# Altium PCB PCB2.PcbDoc
Units mil, origin at the board's own origin, x right, y up, seen from the top; angles counter-clockwise.
Board outline 2283.46 x 3346.46 mil, 2 copper layers (Top Layer, Bottom Layer); 50 components, 32 nets, 159 pads, 39 vias.
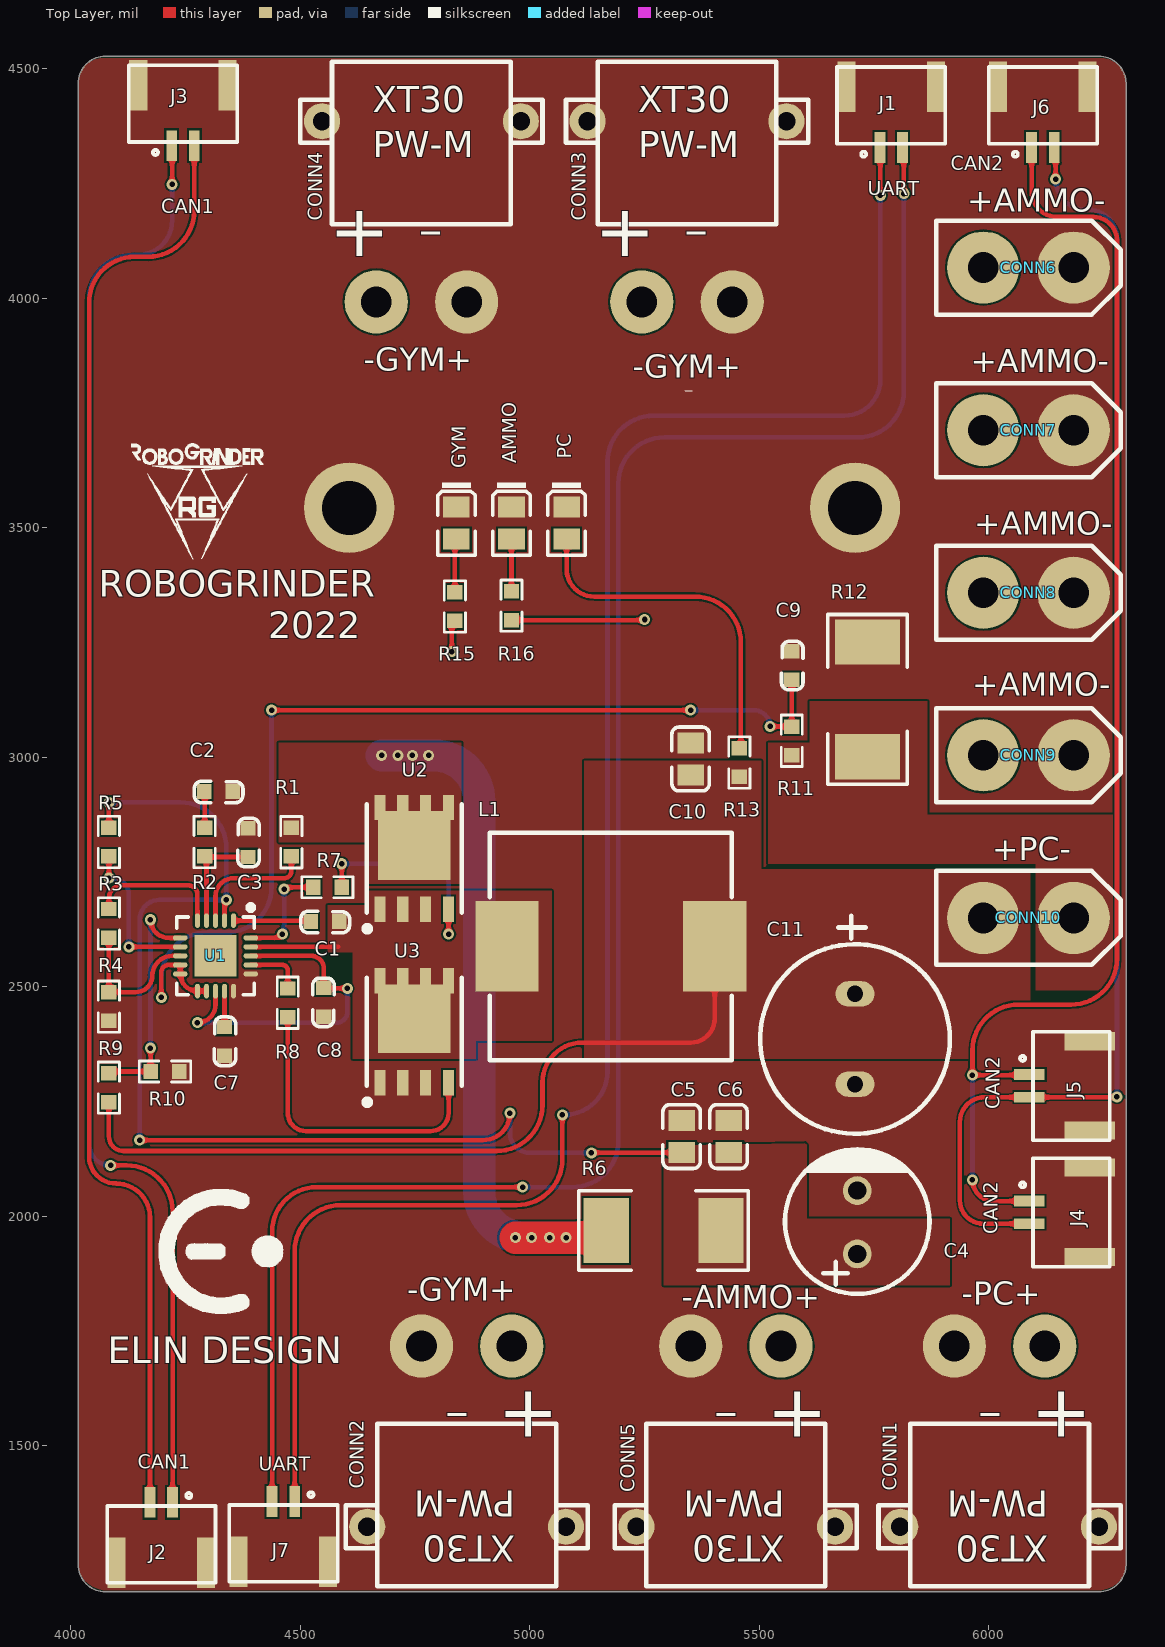
[diagram p0: Top Layer view]
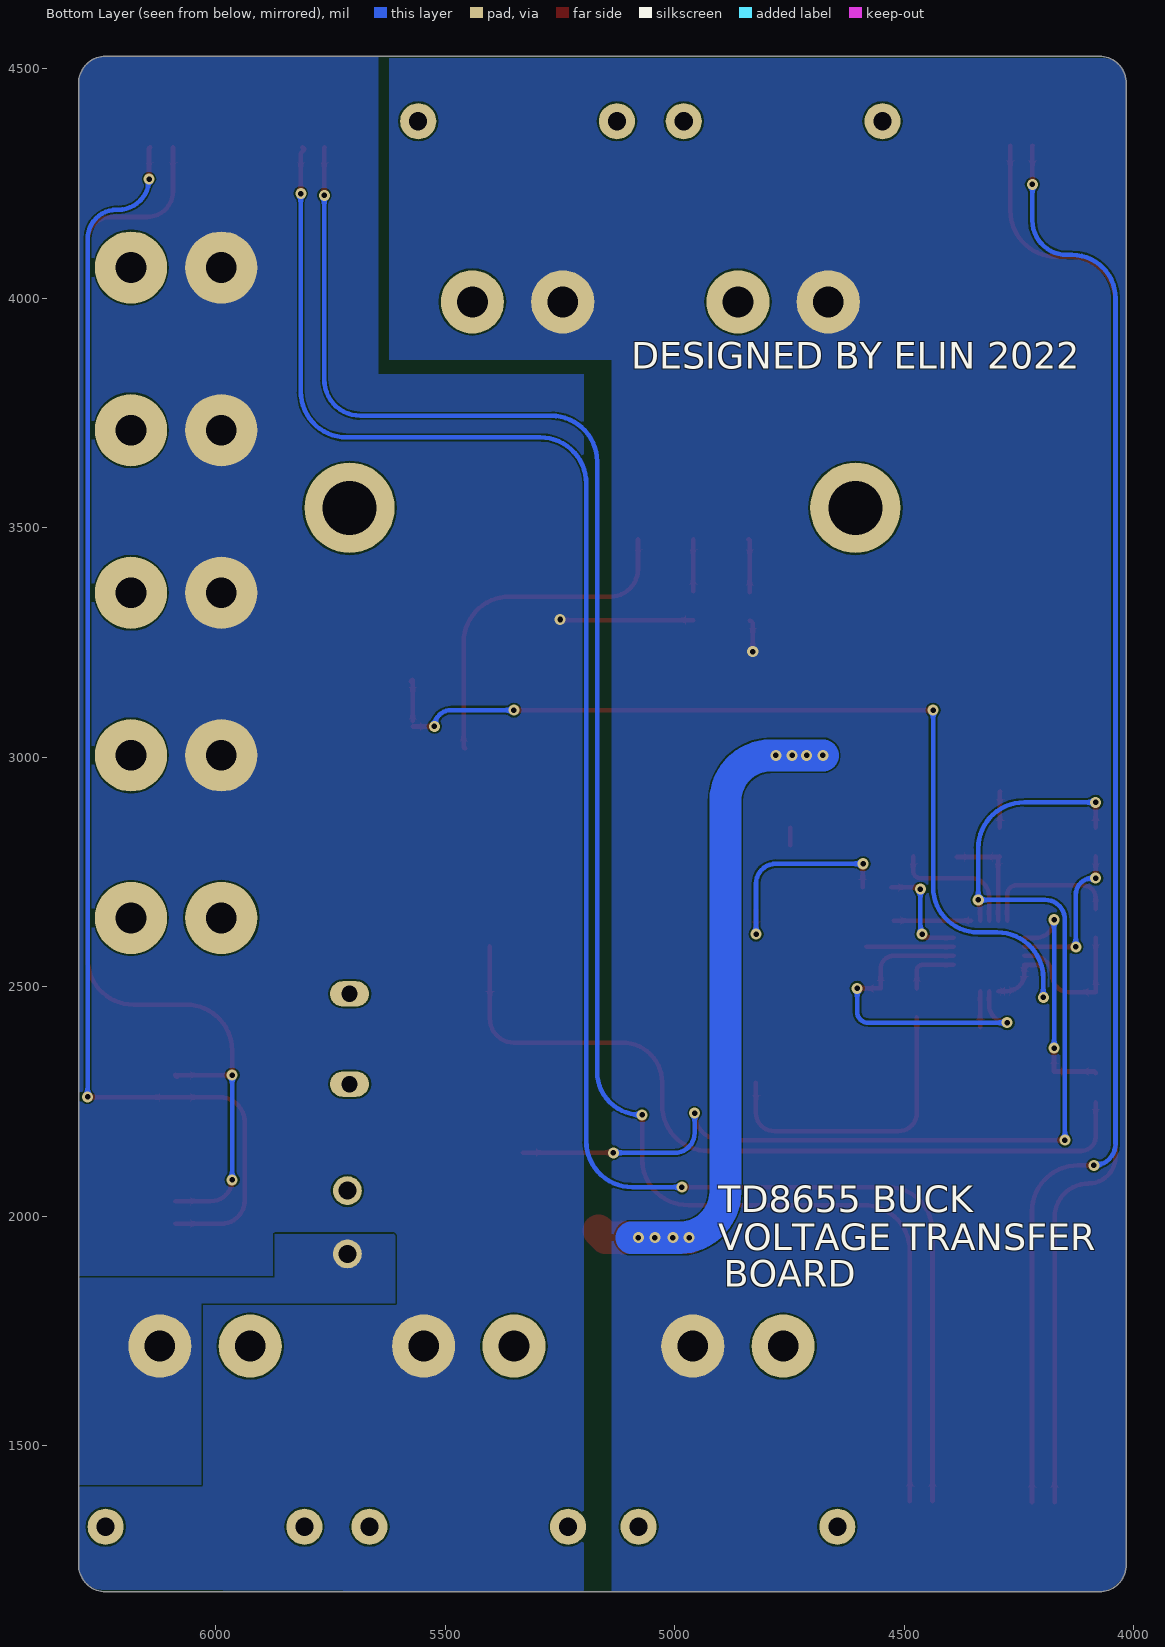
[diagram p1: Bottom Layer view, seen from below]
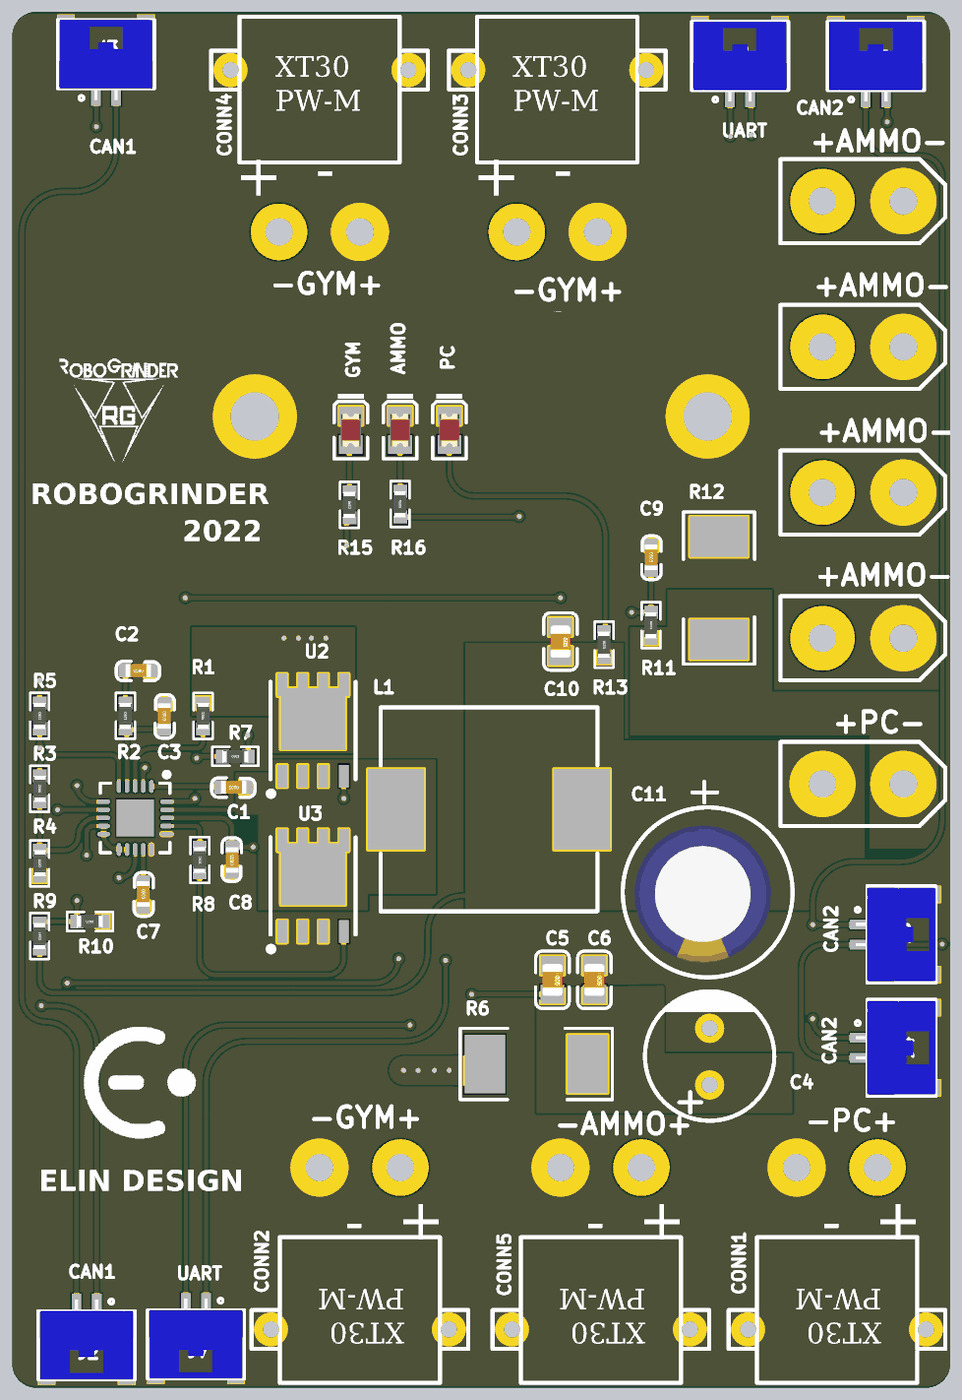
[diagram p2: 3D render of the assembled board from above, using the file's embedded part models]

## Layer stack, top to bottom
Top Solder: solder mask 0.4, Solder Resist, Dk 3.5
Top Layer: signal copper 1.4
Dielectric 1: dielectric 12.6, FR-4, Dk 4.8
Bottom Layer: signal copper 1.4
Bottom Solder: solder mask 0.4, Solder Resist, Dk 3.5

## Board outline
4015.75,1240.16 4015.75,4468.5 cw(c4074.8,4468.5) 4074.8,4527.56 6240.16,4527.56 cw(c6240.16,4468.5) 6299.21,4468.5 6299.21,1240.16 cw(c6240.16,1240.16) 6240.16,1181.1 4074.8,1181.1 cw(c4074.8,1240.16)

## Design rules (kind name [scope] priority, off if disabled: settings)
Clearance [All] p1: gap=4 ignorepadtopadclearanceinfootprint=FALSE
PlaneConnect [All] p1: planeconnectstyle=Direct reliefexpansion=20 reliefentries=4 reliefconductorwidth=10 reliefairgap=10
PolygonConnect [All] p1: connectstyle=Direct reliefconductorwidth=10 reliefentries=4 polygonreliefangle="90 Angle" airgapwidth=10
RoutingVias [All] p1: holewidth=28 width=50 viastyle="Through Hole" minholewidth=28 minwidth=50 maxholewidth=28 maxwidth=50
SolderMaskExpansion [All] p1: expansion=4
Width [All] p1: maxlimit=100 minlimit=10 preferedwidth=10
29 further rules are at their usual default settings.

## Classes and differential pairs
component class Sheet1: C1 C2 C3 C4 C5 C6 C7 C8 C9 C10 C11 CONN1 CONN2 CONN3 CONN4 CONN5 CONN6 CONN7 CONN8 CONN9 CONN10 J1 J2 J3 J4 J5 J6 J7 L1 PC R1 R2 R3 R4 R5 R6 R7 R8 R9 R10 R11 R12 R13 U1 U2 U3

## Components (designator, comment, footprint, x,y, rotation, side; value= is the part's Value field where it differs from the comment)
AMMO "LED" LED_0805 4960,3510 r90 top (schematic designator D1)
C1 "100nF" 0603_C 4555.12,2641.73 r180 top
C2 "2.2nF" 0603_C 4322.83,2925.2 r180 top
C3 "220pF" 0603_C 4385.83,2814.96 r270 top
C4 "100uF" rad8*11 5755.91,1944.88 r90 top
C5 "10uF" 0805_C 5330.71,2173.23 r270 top
C6 "0.1uF" 0805_C 5433.07,2173.23 r270 top
C7 "100nF" 0603_C 4334.65,2381.89 r270 top
C8 "1uF" 0603_C 4551.18,2464.57 r90 top
C9 "4.7uF" 0603_C 5570.87,3200.79 r270 top
C10 "4.7uF" 0805_C 5350.39,2996.06 r270 top
C11 "330uF" dip-ec10*17 5589.66,2474.83 r270 top
CONN1 "XT30PW-M" xt30pw-m 6023.62,1716.54 r180 top
CONN2 "XT30PW-M" xt30pw-m 4862.2,1716.54 r180 top
CONN3 "XT30PW-M" xt30pw-m 5342.52,3992.13 r0 top
CONN4 "XT30PW-M" xt30pw-m 4763.78,3992.13 r0 top
CONN5 "XT30PW-M" xt30pw-m 5448.82,1716.54 r180 top
CONN6 "XT30UPB" XT30UPB 6086.61,4066.93 r0 top
CONN7 "XT30UPB" XT30UPB 6086.61,3712.6 r0 top
CONN8 "XT30UPB" XT30UPB 6086.61,3358.27 r0 top
CONN9 "XT30UPB" XT30UPB 6086.61,3003.94 r0 top
CONN10 "XT30UPB" XT30UPB 6086.61,2649.61 r0 top
GYM "LED" LED_0805 4840,3510 r90 top (schematic designator D1)
J1 "GH1.25-2P" gh1.25-2p-立 5787.4,4460.63 r180 top
J2 "GH1.25-2P" gh1.25-2p-立 4196.85,1244.09 r0 top
J3 "GH1.25-2P" gh1.25-2p-立 4244.09,4464.57 r180 top
J4 "GH1.25-2P" gh1.25-2p-立 6220.47,2007.87 r90 top
J5 "GH1.25-2P" gh1.25-2p-立 6220.47,2283.46 r90 top
J6 "GH1.25-2P" gh1.25-2p-立 6118.11,4460.63 r180 top
J7 "GH1.25-2P" gh1.25-2p-立 4462.87,1246.14 r0 top
L1 "Inductor" SRP1265A-220M 5094.49,2582.68 r0 top value=22uH
PC "LED" LED_0805 5080,3510 r90 top (schematic designator D1)
R1 "20" 0603-R 4480.31,2814.96 r90 top
R2 "300K" 0603-R 4291.34,2814.96 r270 top
R3 "20K" 0603-R 4082.68,2637.8 r90 top
R4 "39K" 0603-R 4082.68,2456.69 r90 top
R5 "1M" 0603-R 4082.68,2814.96 r270 top
R6 "0.005" 2512 5291.34,1968.5 r0 top
R7 "2.2" 0603-R 4559.06,2716.54 r0 top
R8 "2.2" 0603-R 4472.44,2464.57 r270 top
R9 "300k" 0603-R 4082.68,2279.53 r270 top
R10 "20k" 0603-R 4204.72,2314.96 r180 top
R11 "4.7" 0603-R 5570.87,3035.43 r270 top
R12 "0.005" 2512 5736.22,3125.98 r270 top
R13 "10K" 0603-R 5456.69,2988.19 r270 top
R15 "10K" 0603-R 4836.69,3328.19 r270 top (schematic designator R13)
R16 "10K" 0603-R 4960,3330 r270 top (schematic designator R13)
U1 "TD8655" LC-QFN-20_4x4x05P 4314.96,2566.93 r180 top
U2 "TDM3436" LC-DFN-8_5x6mm 4748.03,2779.53 r0 top
U3 "TDM3436" LC-DFN-8_5x6mm 4748.03,2401.57 r0 top

## Footprints (in the part's own frame and the unit in brackets; to place one, negate y for a bottom-side part, rotate by r counter-clockwise, add the part's x,y. Pads: shape width x height; smd on the part's side, far side on the other; paste and mask are expansions set on the pad)
0603-R [mm]
  rect 0.8x0.85 smd: 1(-0.795,0) 2(0.795,0)
  silkscreen extent -1.43,-0.58 1.42,0.58, body extent -0.8,-0.41 0.8,0.39, height 0.4
0603_C [mm]
  rect 0.8x0.85 smd: 1(-0.762,0) 2(0.827,0)
  silkscreen extent -1.32,-0.57 1.37,0.62, body extent -0.8,-0.41 0.8,0.41, height 0.81
0805_C [mm]
  rect 1.16x1.47 smd: 1(-0.89,0) 2(0.89,0)
  silkscreen extent -1.77,-1.04 1.77,1.04, body extent -1,-0.62 1,0.63, height 0.77
2512 [mm] "保险丝"
  rect 2.5x3.6 smd: 1(-3.175,0) 2(3.175,0)
  silkscreen extent -4.7,-2.2 4.7,2.2, body extent -3.17,-1.65 3.17,1.65, height 1.2
dip-ec10*17 [mil]
  oval 55x85 hole 35.43: +(-9.43,119) -(187.43,119)
  silkscreen extent -180,-88 296,326, body extent -74,-60 259,274, height 512
gh1.25-2p-立 [mm]
  rect 0.6x1.7 smd mask+0.05: 1(0.625,3.35) 2(-0.625,3.35)
  rect 1x2.8 smd mask+0.05: P(-2.475,0) P(2.475,0)
  silkscreen extent -3,-1.1 3,3.87, body extent -2.87,-1.1 2.87,3.85, height 4.2
LC-DFN-8_5x6mm [mm]
  rect 4x3.81 smd: 0(0,0.716)
  rect 0.61x1.4 smd: 1(-1.905,-2.816) 2(-0.635,-2.816) 3(0.635,-2.816) 4(1.905,-2.816) 5(1.905,2.816) 6(0.635,2.816) 7(-0.635,2.816) 8(-1.905,2.816)
  silkscreen extent -2.72,-4.02 2.63,3
LC-QFN-20_4x4x05P [mm]
  rect 2.3x2.3 smd mask+0.051: 0(0,0)
  oval 0.28x0.8 smd mask+0.051: 1(-1,-1.95) 2(-0.5,-1.95) 3(0,-1.95) 4(0.5,-1.95) 5(1,-1.95) 11(1,1.95) 12(0.5,1.95) 13(0,1.95) 14(-0.5,1.95) 15(-1,1.95)
  oval 0.8x0.28 smd mask+0.051: 6(1.95,-1) 7(1.95,-0.5) 8(1.95,0) 9(1.95,0.5) 10(1.95,1) 16(-1.95,1) 17(-1.95,0.5) 18(-1.95,0) 19(-1.95,-0.5) 20(-1.95,-1)
  silkscreen extent -2.15,-2.82 2.15,2.15
LED_0805 [mm] "贴片二极管"
  rect 1.16x1.47 smd: 1(-0.89,0) 2(0.89,0)
  silkscreen extent -1.77,-1.03 2.25,1.04, body extent -1.01,-0.62 1.01,0.62, height 1.1
rad8*11 [mm]
  round 1.6 hole 1: +(-0.696,1.078) -(2.804,1.078)
  silkscreen extent -2.91,-2.92 5.09,5.08
SRP1265A-220M [mm]
  rect 3.5x5 smd: 1(-3.667,0.127) 2(7.833,0.127)
  silkscreen extent -4.62,-6.17 8.78,6.43
xt30pw-m [mm]
  round 2 hole 1 mask+0.05: 3(-5.5,10) 3(5.5,10)
  round 3.5 hole 1.7 mask+0.05: N(2.5,0) P(-2.5,0)
  silkscreen extent -6.7,4.3 6.7,13.3
XT30UPB [mm]
  round 4 hole 1.7 mask+0.05: N(2.5,0) P(-2.5,0)
  silkscreen extent -5.1,-2.6 5.1,2.6

## Part data
C1 C2 C3 C5 C6 C7 C8 C9 C10: library part C
C4 C11: library part CD
CONN1 CONN2 CONN3 CONN4 CONN5: "卧式焊板XT30（公）"
CONN6 CONN7 CONN8 CONN9 CONN10: "立式焊板XT30（通用）"
J1 J2 J3 J4 J5 J6 J7: Package=None, Availability=Good, MF=Molex, MP=53261-0271, Price="0.42 USD", SnapEDA_Link=https://www.snapeda.com/parts/53261-0271/Molex/view-part/?ref=snap
R1 R2 R3 R4 R5 R6 R7 R8 R9 R10 R11 R12 R13 R15 R16: library part R
L1: Code_IEC=1005, Code_JEITA=0402, LatestRevisionDate=29-May-2009, LatestRevisionNote="IPC-7351 Footprint Added.", PackageDescription="Chip Inductor", PackageReference=0402-A, Published=8-Jun-2000, Publisher="Altium Limited"

## Free pads (board coordinates)
  round 196.85 hole 118.11: 2(4606.3,3543.31) 2(5708.66,3543.31)

## Via types
v1: diameter 24, hole 12, Top Layer to Bottom Layer, tented both sides, 39 vias

## Nets (pads, with @x,y where several pads share a name; then routed paths per layer and width w, separated by ;. In a path a pad name is that pad's centre, name@x,y a point inside that pad or via, vN(x,y) a via of type N, cw(c..) or ccw(c..) an arc to the next point about the centre after c; other vN are vias at no path point)
AVCC: CONN5.P CONN6.P CONN7.P CONN8.P CONN9.P R16.2 | length 290
  Top Layer w10: R16.2 v1@5250,3298.71
  other v1: 5250,3300
can1h: J2.1 J3.1 | length 3184.6
  Top Layer w10: v1(4086.61,2110.24) 4121.46,2110.24 cw(c4121.46,2010.24) 4221.46,2010.24 J2.1 ; J3.1 cw(c4219.49,4331.69) 4220.47,4331.69 v1(4220.47,4248.03)
  Bottom Layer w10: v1(4086.61,2110.24) cw(c4086.61,2157.48) 4039.37,2157.48 4039.37,4000 cw(c4133.86,4000) 4133.86,4094.49 4145.67,4094.49 ccw(c4145.67,4169.29) 4220.47,4169.29 v1(4220.47,4248.03)
can1l: J2.2 J3.2 | length 3175.9
  Top Layer w10: J2.2 4172.24,1997.05 ccw(c4098.43,1997.05) 4098.43,2070.87 cw(c4098.43,2129.92) 4039.37,2129.92 4039.37,3929.13 4039.37,3990.55 cw(c4139.37,3990.55) 4139.37,4090.55 4168.32,4090.55 ccw(c4168.32,4190.93) 4268.7,4190.93 J3.2
can2h: J4.1 J5.1 J6.1 | length 2896.3
  Top Layer w10: v1(5964.57,2078.74) ccw(c6010.83,2078.74) 6010.83,2032.48 J4.1 ; J5.1@6083.66,2303.15 ccw(c6083.66,2308.07) J5.1 ; J5.1@6083.66,2307.09 v1(5964.57,2307.09) 5964.57,2360.63 cw(c6064.57,2360.63) 6064.57,2460.63 6179.53,2460.63 ccw(c6179.53,2560.63) 6279.53,2560.63 6279.53,4125.98 ccw(c6228.35,4125.98) 6228.35,4177.17 6149.61,4177.17 cw(c6149.61,4233.27) 6093.5,4233.27 J6.1
  Bottom Layer w10: v1(5964.57,2078.74) v1(5964.57,2307.09)
can2l: J4.2 J5.2 J6.2 | length 2873.7
  Top Layer w10: J4.2 5988.19,1983.27 cw(c5988.19,2034.45) 5937.01,2034.45 5937.01,2204.72 cw(c5991.14,2204.72) 5991.14,2258.86 J5.2 6270.67,2258.86 ccw(c6270.67,2259.84) 6271.65,2259.84 v1(6279.53,2259.84) ; J6.2 cw(c6142.72,4325.79) 6145.67,4325.79 v1(6145.67,4259.84)
  Bottom Layer w10: v1(6145.67,4259.84) ccw(c6212.6,4259.84) 6212.6,4192.91 6216.54,4192.91 cw(c6216.54,4129.92) 6279.53,4129.92 v1(6279.53,2259.84)
COMP: C3.2 R2.2 U1.4 | length 234.2
  Top Layer w10: R2.2 ccw(c4292.63,2783.67) 4292.63,2782.39 R2.2@4294.25,2782.39 ; U1.4 4295.28,2779.74 ccw(c4291.34,2779.74) R2.2@4294.25,2782.39 ; C3.2 R2.2@4294.25,2782.39
CS34: C8.2 U1.13 U1.18 | length 752
  Top Layer w10: v1(4275.59,2421.26) ccw(c4275.59,2460.63) 4314.96,2460.63 U1.13 ; U1.18 4523.62,2566.93 cw(c4523.62,2539.37) 4551.18,2539.37 C8.2 ccw(c4552.26,2497.14) 4552.26,2496.06 v1(4602.36,2496.06)
  Bottom Layer w10: v1(4275.59,2421.26) 4578.74,2421.26 ccw(c4578.74,2444.88) 4602.36,2444.88 v1(4602.36,2496.06)
FB: R9.1 R10.2 U1.6 | length 511.5
  Top Layer w10: R9.1 cw(c4086.82,2310.81) 4086.82,2314.96 R10.2 4173.44,2366.14 v1(4173.23,2366.14) ; v1(4173.23,2645.67) ccw(c4212.6,2645.67) 4212.6,2606.3 U1.6
  Bottom Layer w10: v1(4173.23,2366.14) v1(4173.23,2645.67)
GND: AMMO.2 C2.1 C3.1 C4.- C5.1 C6.1 C7.2 C8.1 C9.1 C10.1 C11.- CONN1.3 CONN1.N CONN2.3 CONN2.N CONN3.3 CONN3.N CONN4.3 CONN4.N CONN5.3 CONN5.N CONN6.N CONN7.N CONN8.N CONN9.N GYM.2 J1.P J2.P J3.P J4.P J5.P J6.P J7.P pad.2 PC.2 R4.1 R10.1 R12.1 U1.15 U1.16 U3.1 U3.2 U3.3
GND_OUT: CONN10.N R11.2 R12.2
HSD: R7.1 U1.20 | length 249.4
  Top Layer w10: U1.20 4452.76,2606.3 v1(4460.63,2614.17) ; v1(4464.56,2712.59) 4460.63,2708.66 cw(c4468.5,2708.66) 4468.5,2716.54 R7.1
  Bottom Layer w10: v1(4460.63,2614.17) 4464.56,2618.1 v1(4464.56,2712.59)
ISENSE: R1.1 U1.3 | length 281.7
  Top Layer w10: U1.3 4314.96,2696.85 cw(c4354.33,2696.85) 4354.33,2736.22 4464.57,2736.22 ccw(c4464.57,2751.97) 4480.31,2751.97 R1.1
ISET: R3.1 R4.2 U1.8 | length 319.1
  Top Layer w10: R3.1 R4.2 4141.52,2487.98 ccw(c4141.52,2523.62) 4177.17,2523.62 cw(c4220.47,2523.62) 4220.47,2566.93 U1.8
LSD: R8.1 U1.17 | length 127
  Top Layer w10: U1.17 4460.63,2547.24 cw(c4460.63,2535.43) 4472.44,2535.43 R8.1
NetC1_2: C1.2 U1.1 | length 168.2
  Top Layer w10: U1.1 C1.2@4522.54,2643.7
NetC2_2: C2.2 R2.1 | length 79.6
  Top Layer w10: C2.2 cw(c4290.26,2924.12) 4291.34,2924.12 R2.1
NetC7_1: C7.1 U1.14 | length 78.3
  Top Layer w10: C7.1 U1.14
NetC9_2: C9.2 R11.1 U1.9 U1.10 U1.11 U1.12 | length 2230.6
  Top Layer w10: v1(4196.85,2476.38) 4196.85,2531.5 cw(c4212.6,2531.5) 4212.6,2547.24 U1.9 U1.10 ccw(c4275.59,2527.56) U1.11 U1.12 ; v1(4437.01,3102.36) v1(5350.39,3102.36) ; v1(5523.62,3066.93) 5523.62,3066.72 R11.1 ; R11.1@5570.87,3078.74 C9.2@5570.87,3164.28 ; C9.2 cw(c5570.87,3164.28) C9.2@5574.8,3164.28
  Bottom Layer w10: v1(4196.85,2476.38) 4196.85,2518.11 cw(c4296.85,2518.11) 4296.85,2618.11 4338.58,2618.11 ccw(c4338.58,2716.54) 4437.01,2716.54 v1(4437.01,3102.36) ; v1(5350.39,3102.36) 5488.19,3102.36 cw(c5488.19,3066.93) v1(5523.62,3066.93)
NetD1_1: PC.1 R13.1 | length 768.7
  Top Layer w10: PC.1 5080,3410 ccw(c5140,3410) 5140,3350 5360,3350 cw(c5360,3250) 5460,3250 5460,3022.78 cw(c5456.69,3022.78) R13.1
NetD2_R16: AMMO.1 R16.1 | length 113.7
  Top Layer w10: R16.1 AMMO.1
NetD3_R15: GYM.1 R15.1 | length 117.4
  Top Layer w10: R15.1 4836.69,3471.65 cw(c4840,3471.65) GYM.1
NetR1_2: R1.2 R6.1 U2.0 U2.5 U2.6 U2.7 U2.8 | length 1632
  Top Layer w10: v1@4673.03,2999.8 cw(c4677.17,2999.8) v1(4677.17,3003.94) ; U2.0 U2.0@4748.03,2846.25
  Top Layer w70: v1(4968.5,1952.76) v1(5003.94,1952.76) v1(5043.31,1952.76) v1(5079.23,1952.76) 5150.59,1952.76 R6.1
  Bottom Layer w70: v1(4677.17,3003.94) v1(4712.6,3003.94) v1(4744.09,3003.94) v1(4779.53,3003.94) 4789.76,3003.94 cw(c4789.76,2903.94) 4889.76,2903.94 4889.76,2052.76 ccw(c4989.76,2052.76) 4989.76,1952.76 v1(5003.94,1952.76) v1(5043.31,1952.76) v1(5079.23,1952.76) 5094.49,1952.76
NetR3_2: R3.2 U1.5 | length 300.8
  Top Layer w10: R3.2 4082.68,2692.91 cw(c4110.24,2692.91) 4110.24,2720.47 4255.91,2720.47 cw(c4255.91,2700.79) 4275.59,2700.79 U1.5
NetR5_2: R5.2 U1.7 | length 337.4
  Top Layer w10: v1(4082.68,2736.22) R5.2 ; v1(4125.98,2586.61) U1.7
  Bottom Layer w10: v1(4082.68,2736.22) 4090.55,2736.22 cw(c4090.55,2700.79) 4125.98,2700.79 v1(4125.98,2586.61)
NetR7_2: R7.2 U2.4 | length 479.1
  Top Layer w10: v1(4589.57,2767.72) 4590.55,2767.72 4594.49,2763.78 ccw(c4594.49,2759.63) 4590.34,2759.63 R7.2 ; v1(4822.83,2614.17) 4822.83,2668.66 U2.4
  Bottom Layer w10: v1(4589.57,2767.72) 4779.53,2767.72 cw(c4779.53,2724.41) 4822.83,2724.41 v1(4822.83,2614.17)
NetR8_2: R8.2 U3.4 | length 670.6
  Top Layer w10: R8.2 4472.44,2224.41 ccw(c4511.81,2224.41) 4511.81,2185.04 4783.46,2185.04 ccw(c4783.46,2224.61) 4823.03,2224.61 U3.4
rxd: J1.1 J7.1 | length 4024.5
  Top Layer w10: J7.1 4487.48,1923.62 cw(c4587.48,1923.62) 4587.48,2023.62 4970.87,2023.62 ccw(c4970.87,2123.62) 5070.87,2123.62 v1(5070.87,2220.47) ; J1.1 cw(c5762.8,4327.76) 5763.78,4327.76 v1(5763.78,4224.41)
  Bottom Layer w10: v1(5070.87,2220.47) 5074.8,2220.47 ccw(c5074.8,2314.96) 5169.29,2314.96 5169.29,3644.09 cw(c5269.29,3644.09) 5269.29,3744.09 5685.04,3744.09 ccw(c5685.04,3822.83) 5763.78,3822.83 v1(5763.78,4224.41)
SW: C1.1 L1.1 U1.19 U2.1 U2.2 U2.3 U3.0 U3.5 U3.6 U3.7 U3.8 | length 190.9
  Top Layer w10: U1.19 4582.68,2586.61
txd: J1.2 J7.2 | length 4163
  Top Layer w10: J7.2 4438.27,1965.83 cw(c4535.43,1965.83) 4535.43,2062.99 v1(4984.25,2062.99) ; J1.2 ccw(c5812.01,4323.82) 5807.09,4323.82 5814.96,4315.94 v1(5814.96,4228.35)
  Bottom Layer w10: v1(4984.25,2062.99) 5092.91,2062.99 ccw(c5092.91,2162.99) 5192.91,2162.99 5192.91,3596.85 cw(c5292.91,3596.85) 5292.91,3696.85 5714.96,3696.85 ccw(c5714.96,3796.85) 5814.96,3796.85 v1(5814.96,4228.35)
VCC: CONN2.P CONN3.P CONN4.P R15.2 | length 70.7
  Top Layer w10: v1(4830,3230) 4830,3290.21 cw(c4836.69,3290.21) R15.2
VIN: C4.+ C5.2 C6.2 CONN1.P R5.1 R6.2 U1.2 | length 2503.4
  Top Layer w10: R5.1 v1(4082.68,2901.57) ; v1(4149.61,2165.35) 4897.64,2165.35 ccw(c4897.64,2224.41) v1(4956.69,2224.41) ; U1.2 v1@4334.65,2688.97 ; v1(5133.86,2137.8) 5133.86,2138.19 C5.2
  Bottom Layer w10: v1(4082.68,2901.57) 4238.57,2901.57 cw(c4238.57,2801.57) 4338.57,2801.57 v1(4338.57,2688.97) 4192.91,2688.97 ccw(c4192.91,2645.67) 4149.61,2645.67 v1(4149.61,2165.35) ; v1(4956.69,2224.41) 4956.69,2181.1 ccw(c5000,2181.1) 5000,2137.8 v1(5133.86,2137.8)
VOUT: C10.2 C11.+ CONN10.P L1.2 R9.2 R13.2 | length 1756.5
  Top Layer w10: R9.2 4082.68,2173.23 ccw(c4114.17,2173.23) 4114.17,2141.73 4232.28,2141.73 4927.56,2141.73 ccw(c4927.56,2241.73) 5027.56,2241.73 5027.56,2291.34 cw(c5114.17,2291.34) 5114.17,2377.95 5350.39,2377.95 ccw(c5350.39,2430.43) 5402.87,2430.43 L1.2
pads on no net: U1.0

## Polygon pours and split planes (outlines as drawn)
GND on Top Layer "Top Layer-GND" (solid, remove dead copper, pour order 30): 4016,4471 cw(c4068,4471) 4068,4523 6246,4523 cw(c6246,4469) 6300,4469 6300,1244 cw(c6241,1244) 6241,1185 4075.11,1185 cw(c4075,1244) 4016,1244
SW on Top Layer "Top Layer-SW" (solid, remove dead copper, pour order 8): 4649.61,2708.66 5047.24,2708.66 5047.24,2381.89 4881.89,2381.89 4881.89,2342.52 4614.17,2342.52 4614.17,2574.8 4559.06,2574.8 4559.06,2677.17 4649.61,2677.17
VIN on Top Layer "Top Layer-VIN" (solid, pour order 0): 5292,2154 5292,1849 5915,1849 5915,1994 5603,1994 5603,2159
NetR1_2 on Top Layer "Top Layer-NetR1_2" (solid, remove dead copper, pour order 16): 4452.76,2814.96 4452.76,3031.5 4850.39,3031.5 4850.39,2724.41 4649.61,2724.41 4649.61,2814.96
GND_OUT on Top Layer "Top Layer-GND_OUT" (solid, remove dead copper, pour order 18): 5866.14,3122.05 5866.14,2874.02 6271.65,2874.02 6271.65,2492.13 6102.36,2492.13 6102.36,2767.72 5519.69,2767.72 5519.69,3031.5 5610.24,3031.5 5610.24,3122.05
VOUT on Top Layer "Top Layer-VOUT" (solid, remove dead copper, pour order 10): 5118.11,2342.52 5118.11,2992.13 5503.94,2992.13 5503.94,2755.91 6090.55,2755.91 6090.55,2342.52
AVCC on Bottom Layer "Bottom Layer-AVCC" (solid, remove dead copper, pour order 26): 5198,1181.11 5198,3834.65 5645.67,3834.65 5645.67,4527.56 6240.16,4527.56 cw(c6240.16,4468.51) 6299.21,4468.5 6299.21,1240.16 cw(c6244.09,1240.16) 6244.09,1185.04
VCC on Bottom Layer "Bottom Layer-VCC" (solid, remove dead copper, pour order 22): 4078.74,1181.1 5137.8,1181.1 5137.8,3866.14 5622.05,3866.14 5622.05,4523.62 4066.93,4523.62 ccw(c4066.93,4472.44) 4015.75,4472.44 4015.75,1244.09 ccw(c4078.74,1244.09)
VIN on Bottom Layer "Bottom Layer-VIN" (solid, pour order 4): 5609,1961 5609,1810 6032,1810 6032,1414 6298,1414 6298,1866 5872,1866 5872,1960

## Silkscreen, mask and mechanical layers (free items; w line width, h text height)
Top Overlay:
  drawing of 1801 lines, arcs and shapes, not listed
  text "CAN2" at 5917.32,4279.53 h30
  text "UART" at 5736.22,4224.41 h30
  text "+AMMO-" at 5952.76,4188.98 h50
  text "CAN1" at 4196.85,4185.04 h30
  text "-GYM+" at 4637.8,3842.52 h50
  text "+AMMO-" at 5960.63,3838.58 h50
  text "-GYM+" at 5224.41,3826.77 h50
  text "+AMMO-" at 5968.5,3484.25 h50
  text "ROBOGRINDER" at 4060,3330 h100
  text "2022" at 4430,3240 h100
  text "+AMMO-" at 5964.57,3133.86 h50
  text "+PC-" at 6007.87,2775.59 h50
  text "CAN2" at 6023.62,2232.28 h30 r90
  text "CAN2" at 6019.69,1960.63 h30 r90
  text "-GYM+" at 4732.28,1814.96 h50
  text "-PC+" at 5940.94,1807.09 h50
  text "-AMMO+" at 5330.71,1799.21 h50
  text "ELIN DESIGN" at 4080,1660 h100
  text "CAN1" at 4145.67,1448.82 h30
  text "UART" at 4409.45,1444.88 h30
Bottom Overlay:
  text "DESIGNED BY ELIN 2022" at 5094.49,3826.77 h100
  text "TD8655 BUCK" at 4905.51,1988.19 h100
  text "VOLTAGE TRANSFER" at 4905.51,1905.51 h100
  text "BOARD" at 4893.7,1826.77 h100
Mechanical 1:
  the board outline again, w10

## Dimensions
6240.16,1181.1 to 6240.16,4527.56 on Mechanical 1
4015.75,1240.16 to 6299.21,1240.16 on Mechanical 1

## Text inside footprints (layer, text, board x,y; h text height)
CONN1: Top Overlay "XT30 / PW-M" at 6129.92,1421.26 h98.43 r180; Top Overlay "+" at 6224.41,1655.51 h196.85 r180; Top Overlay "-" at 6031.5,1644.68 h196.85 r180
CONN2: Top Overlay "-" at 4870.08,1644.69 h196.85 r180; Top Overlay "+" at 5062.99,1655.51 h196.85 r180; Top Overlay "XT30 / PW-M" at 4968.5,1421.26 h98.43 r180
CONN3: Top Overlay "+" at 5141.73,4053.15 h196.85; Top Overlay "-" at 5334.65,4063.98 h196.85; Top Overlay "XT30 / PW-M" at 5236.22,4287.4 h98.43
CONN4: Top Overlay "-" at 4755.91,4063.98 h196.85; Top Overlay "+" at 4562.99,4053.15 h196.85; Top Overlay "XT30 / PW-M" at 4657.48,4287.4 h98.43
CONN5: Top Overlay "-" at 5456.69,1644.68 h196.85 r180; Top Overlay "XT30 / PW-M" at 5555.12,1421.26 h98.43 r180; Top Overlay "+" at 5649.61,1655.51 h196.85 r180